# EAGLE board PCB_schematic_v1 (EAGLE 9.6.2), part 1 of 2
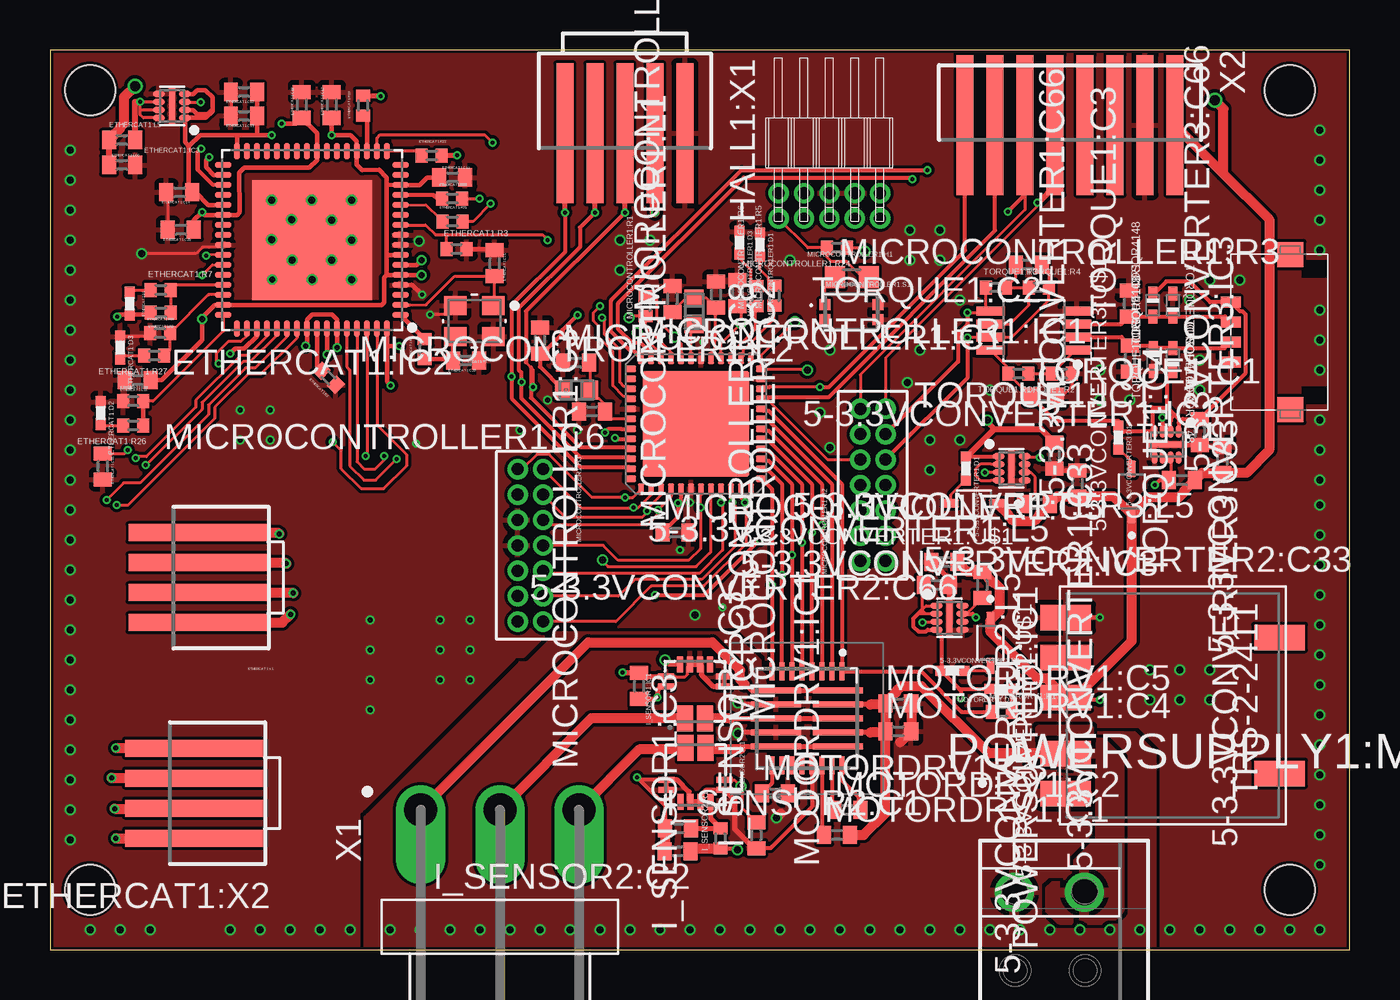
[diagram p0: board, top side]
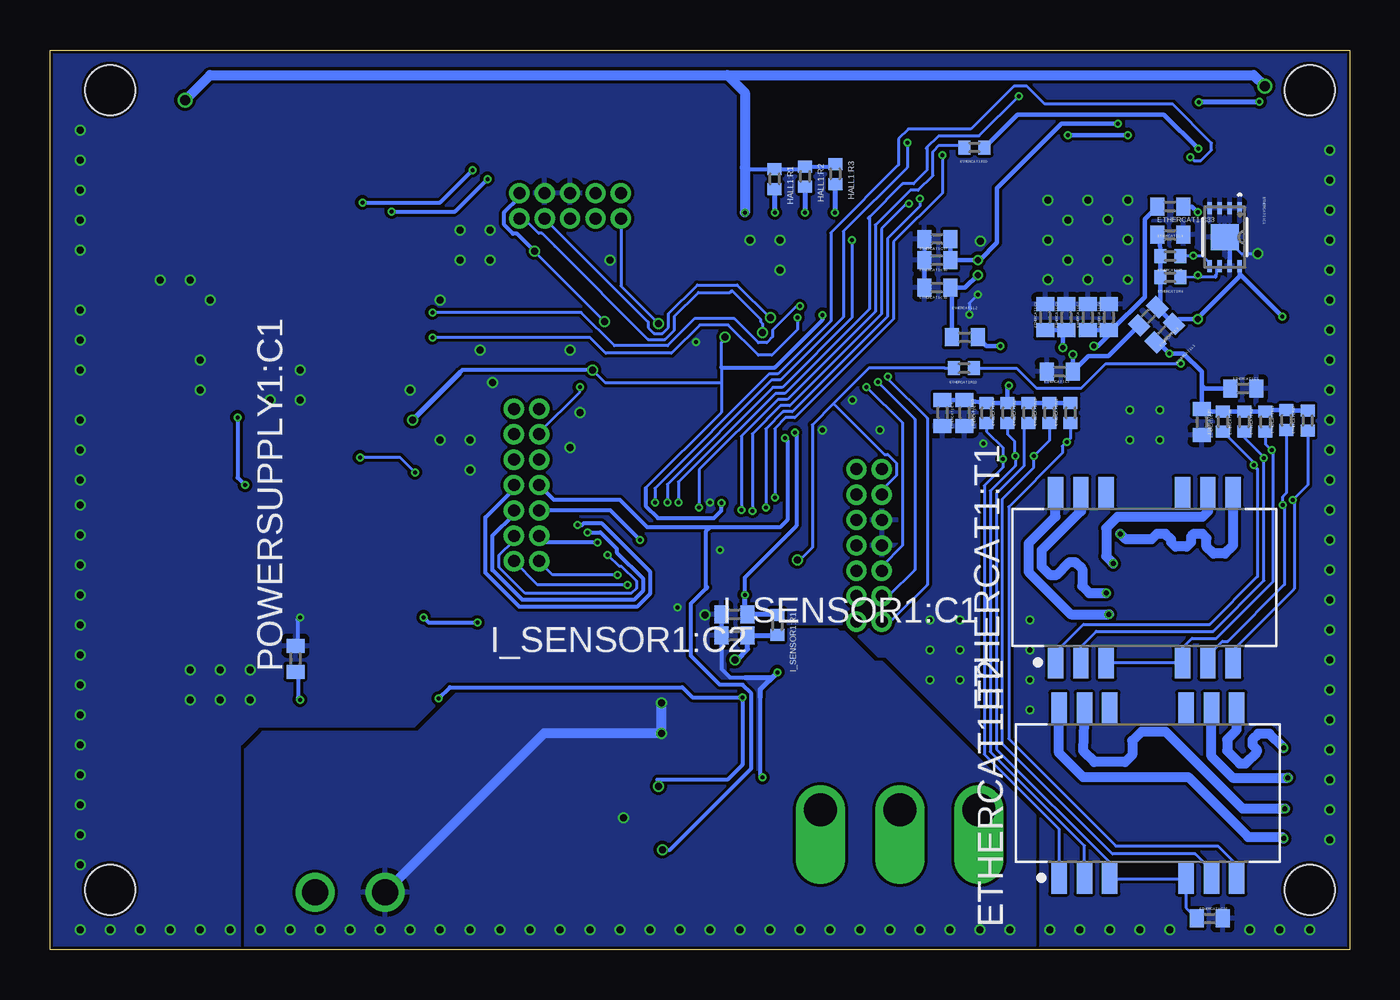
[diagram p1: board, bottom side, seen from below]

Size 65 x 45 mm. Coordinates in mm from the lower left corner, seen from the top.
Outline: 0,0 65,0 65,45 0,45 0,0
Copper layers (1*16): Top 0.035mm / dielectric 1.5mm / Bottom 0.035mm
Design rules "msrm": minimum track width 0.1mm, minimum drill 0.2mm, track to track 6mil, track to pad 6mil, pad to pad 6mil, via to via 6mil, smd to smd 6mil, copper to edge 6mil, drill to drill 6mil, minimum pad ring 0.1mm, minimum via ring 0.1mm, stop-mask expansion 4mil, vias tented up to drill 0mil, thermal gap 10mil
Net classes: 0 Signal: width 0.152 mm, drill 0.2 mm, clearance 0.152 mm; 1 Power: width 0.5 mm, drill 0.2 mm, clearance 0.152 mm; 2 Ethernet: width 0.152 mm, drill 0.25 mm, clearance 0.1 mm
Holes 2.5 mm at 2,43 62,43 2,3 62,3

## Footprints (pad centres in the part's own frame; a part is rotated, then mirrored left to right if it is on the bottom)
C0402 = smd 0.7 x 0.9: 1 -0.65,0; 2 0.65,0
LED0402 = smd 0.6 x 0.5: 1 -0.55,0; 2 0.55,0
SON40P120X160X40-9T30X130N = smd 0.611 x 0.3: 1 -0.651,0.6; 2 -0.651,0.2; 3 -0.651,-0.2; 4 -0.651,-0.6; 5 0.651,-0.6; 6 0.651,-0.2; 7 0.651,0.2; 8 0.651,0.6 | smd 0.3 x 1.8: 9 0,0
BEAD0402 = smd 0.7 x 0.9: 1 -0.65,0; 2 0.65,0
SODFL2513X100N = smd 0.82 x 0.44: A 1.15,0; C -1.15,0
UDFN8 = smd 0.606 x 0.225: 1 -1.446,0.75; 2 -1.446,0.25; 3 -1.446,-0.25; 4 -1.446,-0.75; 5 1.446,-0.75; 6 1.446,-0.25; 7 1.446,0.25; 8 1.446,0.75 | smd 1.295 x 1.397: 9 0,0
QFN64-T600 = smd 0.837 x 0.264: 1 -4.437,3.75; 2 -4.437,3.25; 3 -4.437,2.75; 4 -4.437,2.25; 5 -4.437,1.75; 6 -4.437,1.25; 7 -4.437,0.75; 8 -4.437,0.25; 9 -4.437,-0.25; 10 -4.437,-0.75; 11 -4.437,-1.25; 12 -4.437,-1.75; 13 -4.437,-2.25; 14 -4.437,-2.75; 15 -4.437,-3.25; 16 -4.437,-3.75; 33 4.437,-3.75; 34 4.437,-3.25; 35 4.437,-2.75; 36 4.437,-2.25; 37 4.437,-1.75; 38 4.437,-1.25; 39 4.437,-0.75; 40 4.437,-0.25; 41 4.437,0.25; 42 4.437,0.75; 43 4.437,1.25; 44 4.437,1.75; 45 4.437,2.25; 46 4.437,2.75; 47 4.437,3.25; 48 4.437,3.75 | smd 0.264 x 0.837: 17 -3.75,-4.437; 18 -3.25,-4.437; 19 -2.75,-4.437; 20 -2.25,-4.437; 21 -1.75,-4.437; 22 -1.25,-4.437; 23 -0.75,-4.437; 24 -0.25,-4.437; 25 0.25,-4.437; 26 0.75,-4.437; 27 1.25,-4.437; 28 1.75,-4.437; 29 2.25,-4.437; 30 2.75,-4.437; 31 3.25,-4.437; 32 3.75,-4.437; 49 3.75,4.437; 50 3.25,4.437; 51 2.75,4.437; 52 2.25,4.437; 53 1.75,4.437; 54 1.25,4.437; 55 0.75,4.437; 56 0.25,4.437; 57 -0.25,4.437; 58 -0.75,4.437; 59 -1.25,4.437; 60 -1.75,4.437; 61 -2.25,4.437; 62 -2.75,4.437; 63 -3.25,4.437; 64 -3.75,4.437 | smd 6 x 6: 65 0,0
R0402 = smd 0.6 x 0.7: 1 -0.5,0; 2 0.5,0
SOIC127P965X533-16-TRAFO = smd 1.512 x 0.772: 1 -4.275,4.445; 2 -4.275,3.175; 3 -4.275,1.905; 6 -4.275,-1.905; 7 -4.275,-3.175; 8 -4.275,-4.445; 9 4.275,-4.445; 10 4.275,-3.175; 11 4.275,-1.905; 14 4.275,1.905; 15 4.275,3.175; 16 4.275,4.445
87438-04 = smd 7 x 0.85: 1 0,2.25; 2 0,0.75; 3 0,-0.75; 4 0,-2.25
ECX-2236 = smd 1.112 x 0.962: 1 -0.95,-0.775; 2 0.95,-0.775; 3 0.95,0.775; 4 -0.95,0.775
87438-05 = smd 7 x 0.85: 1 0,3; 2 0,1.5; 3 0,0; 4 0,-1.5; 5 0,-3
QFN12-ES = smd 1.3 x 0.8: 1,2 -1.35,0.5; 3,4 -1.35,-0.5 | smd 0.3 x 0.8: 5 0.25,-1.45; 6 0.75,-1.45; 11 0.75,1.45; 12 0.25,1.45 | smd 0.8 x 0.3: 7 1.35,-0.75; 8 1.35,-0.25; 9 1.35,0.25; 10 1.35,0.75
20021112-00010 = drill 0.6 pad 1.016: 1 -2.54,-0.635; 2 -2.54,0.635; 3 -1.27,-0.635; 4 -1.27,0.635; 5 0,-0.635; 6 0,0.635; 7 1.27,-0.635; 8 1.27,0.635; 9 2.54,-0.635; 10 2.54,0.635
20021111-00014 = drill 0.6 pad 1.016: 1 -3.81,-0.635; 2 -3.81,0.635; 3 -2.54,-0.635; 4 -2.54,0.635; 5 -1.27,-0.635; 6 -1.27,0.635; 7 0,-0.635; 8 0,0.635; 9 1.27,-0.635; 10 1.27,0.635; 11 2.54,-0.635; 12 2.54,0.635; 13 3.81,-0.635; 14 3.81,0.635
QFN48 = smd 0.55 x 0.3: 1 -3.275,2.75; 2 -3.275,2.25; 3 -3.275,1.75; 4 -3.275,1.25; 5 -3.275,0.75; 6 -3.275,0.25; 7 -3.275,-0.25; 8 -3.275,-0.75; 9 -3.275,-1.25; 10 -3.275,-1.75; 11 -3.275,-2.25; 12 -3.275,-2.75; 25 3.275,-2.75; 26 3.275,-2.25; 27 3.275,-1.75; 28 3.275,-1.25; 29 3.275,-0.75; 30 3.275,-0.25; 31 3.275,0.25; 32 3.275,0.75; 33 3.275,1.25; 34 3.275,1.75; 35 3.275,2.25; 36 3.275,2.75 | smd 0.3 x 0.55: 13 -2.75,-3.275; 14 -2.25,-3.275; 15 -1.75,-3.275; 16 -1.25,-3.275; 17 -0.75,-3.275; 18 -0.25,-3.275; 19 0.25,-3.275; 20 0.75,-3.275; 21 1.25,-3.275; 22 1.75,-3.275; 23 2.25,-3.275; 24 2.75,-3.275; 37 2.75,3.275; 38 2.25,3.275; 39 1.75,3.275; 40 1.25,3.275; 41 0.75,3.275; 42 0.25,3.275; 43 -0.25,3.275; 44 -0.75,3.275; 45 -1.25,3.275; 46 -1.75,3.275; 47 -2.25,3.275; 48 -2.75,3.275 | smd 5.309 x 5.309: EXP 0,0
BEADC1608X80 = smd 0.813 x 0.94: 1 -0.673,0; 2 0.673,0
R0603 = smd 1 x 1.1: 1 -0.85,0; 2 0.85,0
USLPT2616CT = smd 0.55 x 0.55: 1 -1.325,0.375; 2 1.325,0.375; 3 -1.325,-0.375; 4 1.325,-0.375
MP6540HGUP = smd 0.9 x 0.25: 1 -2.35,1.75; 2 -2.35,1.25; 3 -2.35,0.75; 4 -2.35,0.25; 5 -2.35,-0.25; 6 -2.35,-0.75; 7 -2.35,-1.25; 8 -2.35,-1.75; 14 2.35,-1.75; 15 2.35,-1.25; 16 2.35,-0.75; 17 2.35,-0.25; 18 2.35,0.25; 19 2.35,0.75; 20 2.35,1.25; 21 2.35,1.75 | smd 0.3 x 2.5: 9 -1.4,-1.55; 10 -0.7,-1.55; 11 0,-1.55; 12 0.7,-1.55; 13 1.4,-1.55; 22 1.4,1.55; 23 0.7,1.55; 24 0,1.55; 25 -0.7,1.55; 26 -1.4,1.55
7-SMD = smd 1.27 x 2.54: 1 4.4,-5.35; 2 2.4,-5.35; 3 -0.4,-5.35; 4 -2.4,-5.35; 5 -4.4,-5.35; 6 3.4,5.35; 7 -3.4,5.35
1945096 = drill 1.3: 1 -1.75,0; 2 1.75,0
0402/SOD-923F = smd 0.711 x 0.457: 1 -0.572,0; 2 0.572,0
USOP8 = smd 1.425 x 0.467: 1 -2.164,0.975; 2 -2.164,0.325; 3 -2.164,-0.325; 4 -2.164,-0.975; 5 2.164,-0.975; 6 2.164,-0.325; 7 2.164,0.325; 8 2.164,0.975
5037630491 = smd 0.55 x 1: 1 1.5,0; 2 0.5,0; 3 -0.5,0; 4 -1.5,0 | smd 1.26 x 1.3: P$1 3.875,2.99; P$2 -3.875,2.99
B3PS-VH(LF)(SN) = drill 1.65 offset: 1 -3.96,0; 2 0,0; 3 3.96,0
87438-08 = smd 7 x 0.85: 1 0,5.25; 2 0,3.75; 3 0,2.25; 4 0,0.75; 5 0,-0.75; 6 0,-2.25; 7 0,-3.75; 8 0,-5.25

## Placement (x,y rotation side)
5-3.3VCONVERTER1:C33  GRM155C80J106ME11D  [C0402]  50.25,24.71 270 top
5-3.3VCONVERTER1:C66  GCM155C71A105KE38D  [C0402]  51.39,23.31 90 top
5-3.3VCONVERTER1:D1  QBLP595-R  [LED0402]  45.82,24.06 270 top
5-3.3VCONVERTER1:IC3  RP115L331D-E2  [SON40P120X160X40-9T30X130N]  48.09,24.07 0 top
5-3.3VCONVERTER1:L5  BLM15EG221SH1D  [BEAD0402]  49.36,22.3 180 top
5-3.3VCONVERTER1:U$1  MM3Z3V0B  [SODFL2513X100N]  46.22,22.32 180 top
5-3.3VCONVERTER2:C33  GRM155C80J106ME11D  [C0402]  44.35,18.24 0 top
5-3.3VCONVERTER2:C66  GCM155C71A105KE38D  [C0402]  44.75,19.38 180 top
5-3.3VCONVERTER2:D1  QBLP595-R  [LED0402]  45.13,13.93 0 top
5-3.3VCONVERTER2:IC3  RP115L331D-E2  [SON40P120X160X40-9T30X130N]  44.98,16.59 0 top
5-3.3VCONVERTER2:L5  BLM15EG221SH1D  [BEAD0402]  46.64,18.24 270 top
5-3.3VCONVERTER2:U$1  MM3Z3V0B  [SODFL2513X100N]  47.05,15.34 270 top
5-3.3VCONVERTER3:C33  GRM155C80J106ME11D  [C0402]  57.5,25.89 270 top
5-3.3VCONVERTER3:C66  GCM155C71A105KE38D  [C0402]  58.64,24.5 90 top
5-3.3VCONVERTER3:D1  QBLP595-R  [LED0402]  53.45,25.62 270 top
5-3.3VCONVERTER3:IC3  RP115L331D-E2  [SON40P120X160X40-9T30X130N]  55.85,25.26 270 top
5-3.3VCONVERTER3:L5  BLM15EG221SH1D  [BEAD0402]  56.61,23.48 180 top
5-3.3VCONVERTER3:U$1  MM3Z3V0B  [SODFL2513X100N]  54.1,22.9 90 top
ETHERCAT1:C1  GCM155C71A105KE38D  [C0402]  5.32,28.06 0 bottom
ETHERCAT1:C2  100n  [C0402]  7.4,26.39 270 bottom
ETHERCAT1:C3  GCM155C71A105KE38D  [C0402]  19.26,26.85 270 bottom
ETHERCAT1:C4  100n  [C0402]  20.36,26.85 270 bottom
ETHERCAT1:C5  100n  [C0402]  14.5,28.9 180 bottom
ETHERCAT1:C6  1u  [C0402]  12.04,31.63 90 bottom
ETHERCAT1:C7  100n  [C0402]  13.1,31.63 90 bottom
ETHERCAT1:C8  1u  [C0402]  15.22,31.63 90 bottom
ETHERCAT1:C9  100n  [C0402]  14.16,31.63 90 bottom
ETHERCAT1:C10  100n  [C0402]  20.62,33.11 180 bottom
ETHERCAT1:C11  100n  [C0402]  20.12,38.62 0 top
ETHERCAT1:C12  100n  [C0402]  14.1,42.25 90 top
ETHERCAT1:C13  100n  [C0402]  9.7,41.7 180 top
ETHERCAT1:C14  100n  [C0402]  6.47,37.88 180 top
ETHERCAT1:C15  100n  [C0402]  4.38,28.49 180 top
ETHERCAT1:C16  1u  [C0402]  20.62,34.49 180 bottom
ETHERCAT1:C17  470p  [C0402]  20.62,35.55 180 bottom
ETHERCAT1:C18  100n  [C0402]  12.6,42.25 90 top
ETHERCAT1:C19  100n  [C0402]  6.55,36.01 180 top
ETHERCAT1:C20  18p  [C0402]  20.8,29.46 180 top
ETHERCAT1:C21  18p  [C0402]  22.25,34.33 270 top
ETHERCAT1:C22  100n  [C0402]  9.7,42.9 180 top
ETHERCAT1:C31  22n  [C0402]  2.64,24.17 270 top
ETHERCAT1:C32  22n  [C0402]  6.99,1.55 0 bottom
ETHERCAT1:C33  GRM155C80J106ME11D  [C0402]  8.97,35.75 0 bottom
ETHERCAT1:C66  GCM155C71A105KE38D  [C0402]  3.6,39.25 0 top
ETHERCAT1:D1  QBLP595-IG  [LED0402]  3.98,32.3 270 top
ETHERCAT1:D2  QBLP595-IB  [LED0402]  2.54,26.84 270 top
ETHERCAT1:D3  QBLP595-O  [LED0402]  3.51,30.11 270 top
ETHERCAT1:IC1  CAT24C512IGT3HU5  [UDFN8]  6.24,35.63 270 bottom
ETHERCAT1:IC2  LAN9253-I/R4X  [QFN64-T600]  13.1,35.5 180 top
ETHERCAT1:IC3  RP115L331D-E2  [SON40P120X160X40-9T30X130N]  6.1,42.2 180 top
ETHERCAT1:L1  BLM15EG221SH1D  [BEAD0402]  9.24,30.83 225 bottom
ETHERCAT1:L2  BLM15EG221SH1D  [BEAD0402]  19.25,30.63 0 bottom
ETHERCAT1:L3  BLM15EG221SH1D  [BEAD0402]  10.07,31.68 225 bottom
ETHERCAT1:L4  BLM15EG221SH1D  [BEAD0402]  8.97,37.16 180 bottom
ETHERCAT1:L5  BLM15EG221SH1D  [BEAD0402]  3.6,40.5 0 top
ETHERCAT1:R1  RT0402FRE070RL  [R0402]  18.75,30.03 90 top
ETHERCAT1:R2  12k1  [R0402]  13.94,28.6 135 top
ETHERCAT1:R3  RL1206FR-7WL  [R0402]  20.34,35.05 0 top
ETHERCAT1:R4  4k7  [R0402]  8.97,33.63 180 bottom
ETHERCAT1:R5  4k7  [R0402]  8.97,34.69 180 bottom
ETHERCAT1:R6  10k  [R0402]  5.55,31.87 180 top
ETHERCAT1:R7  RL1206FR-7WL  [R0402]  5.55,33 0 top
ETHERCAT1:R8  49R9  [R0402]  5.27,26.41 90 bottom
ETHERCAT1:R9  49R9  [R0402]  6.33,26.41 90 bottom
ETHERCAT1:R10  49R9  [R0402]  2.1,26.46 90 bottom
ETHERCAT1:R11  49R9  [R0402]  3.15,26.48 90 bottom
ETHERCAT1:R12  49R9  [R0402]  13.96,26.85 90 bottom
ETHERCAT1:R13  49R9  [R0402]  15.01,26.85 90 bottom
ETHERCAT1:R14  49R9  [R0402]  17.11,26.85 90 bottom
ETHERCAT1:R15  49R9  [R0402]  18.16,26.85 90 bottom
ETHERCAT1:R16  RT0402FRE070RL  [R0402]  4.21,26.41 90 bottom
ETHERCAT1:R17  RT0402FRE070RL  [R0402]  16.06,26.85 90 bottom
ETHERCAT1:R18  100  [R0402]  15.66,42.22 90 top
ETHERCAT1:R19  100  [R0402]  19.28,29.08 180 bottom
ETHERCAT1:R20  100  [R0402]  18.76,40.12 180 bottom
ETHERCAT1:R21  100  [R0402]  20.13,36.42 0 top
ETHERCAT1:R22  100  [R0402]  20.12,37.56 0 top
ETHERCAT1:R23  100  [R0402]  19.1,39.72 0 top
ETHERCAT1:R24  10k  [R0402]  4.16,27.43 0 top
ETHERCAT1:R25  10k  [R0402]  5.5,30.84 0 top
ETHERCAT1:R26  RL1206FR-7WL  [R0402]  4.16,26.21 180 top
ETHERCAT1:R27  RL1206FR-7WL  [R0402]  5.22,29.71 180 top
ETHERCAT1:T1  749020100  [SOIC127P965X533-16-TRAFO]  10.26,18.61 90 bottom
ETHERCAT1:T2  749020100  [SOIC127P965X533-16-TRAFO]  10.08,7.82 90 bottom
ETHERCAT1:X1  87438-0443  [87438-04]  7.43,18.61 180 top
ETHERCAT1:X2  87438-0443  [87438-04]  7.26,7.82 180 top
ETHERCAT1:Y1  [ECX-2236]  21.23,31.44 180 top
HALL1:R1  RT0402BRD0710KL  [R0402]  28.76,38.55 270 bottom
HALL1:R2  RT0402BRD0710KL  [R0402]  27.24,38.67 270 bottom
HALL1:R3  RT0402BRD0710KL  [R0402]  25.71,38.8 270 bottom
HALL1:X1  87438-0543  [87438-05]  28.76,40.83 270 top
I_SENSOR1:C1  GCM155R71E103KA37  [C0402]  30.76,15.7 0 bottom
I_SENSOR1:C2  GCM155R71C104JA55  [C0402]  30.77,16.77 180 bottom
I_SENSOR1:C3  GCM155R71C104JA55  [C0402]  29.47,13.18 270 top
I_SENSOR1:IC1  ACS70331EESATR-005B3  [QFN12-ES]  32.26,12.91 90 top
I_SENSOR1:R1  RT0402FRE07100RL  [R0402]  28.62,16.23 270 bottom
I_SENSOR2:C1  GCM155R71E103KA37  [C0402]  31.42,6.07 0 top
I_SENSOR2:C2  GCM155R71C104JA55  [C0402]  31.39,4.92 180 top
I_SENSOR2:C3  GCM155R71C104JA55  [C0402]  35.33,5.71 90 top
I_SENSOR2:IC1  ACS70331EESATR-005B3  [QFN12-ES]  32.29,8.73 270 top
I_SENSOR2:R1  RT0402FRE07100RL  [R0402]  33.53,5.56 90 top
MICROCONTROLLER1:C1  GRM155C80J106ME11D  [C0402]  26.31,29.35 0 top
MICROCONTROLLER1:C2  GCM155R71C104JA55  [C0402]  34.38,32.84 270 top
MICROCONTROLLER1:C3  GRM155C80J106ME11D  [C0402]  24.5,30.46 270 top
MICROCONTROLLER1:C5  GCM155R71C104JA55  [C0402]  31.28,20.85 0 top
MICROCONTROLLER1:C6  GCM155R71C104JA55  [C0402]  27.12,26.91 180 top
MICROCONTROLLER1:C7  GCM155R71C104JA55  [C0402]  31.13,32.54 90 top
MICROCONTROLLER1:C8  GRM155C80J475MEAAD  [C0402]  33.32,32.76 270 top
MICROCONTROLLER1:D1  QBLP595-AG  [LED0402]  35.52,35.25 270 top
MICROCONTROLLER1:D3  QBLP595-AG  [LED0402]  34.49,35.36 270 top
MICROCONTROLLER1:H1  20021112-00010T4LF  [20021112-00010]  38.98,37.2 180 top
MICROCONTROLLER1:H2  20021111-00014T1LF  [20021111-00014]  41.16,23.24 90 top
MICROCONTROLLER1:H3  20021111-00014T1LF  [20021111-00014]  24.03,20.22 270 top
MICROCONTROLLER1:IC1  ATSAMD51G19A-MUT  [QFN48]  32.31,26.3 0 top
MICROCONTROLLER1:L1  BLM18EG601SN1D  [BEADC1608X80]  32.22,31.93 90 top
MICROCONTROLLER1:L2  BLM18EG601SN1D  [BEADC1608X80]  26.34,27.99 0 top
MICROCONTROLLER1:R1  RT0402FRE071KL  [R0402]  29.79,32.19 90 top
MICROCONTROLLER1:R3  RT0603FRE07330RL  [R0603]  40.1,33.64 0 top
MICROCONTROLLER1:R5  10k  [R0402]  36.23,32.7 90 top
MICROCONTROLLER1:R6  10k  [R0402]  35.35,32.7 90 top
MICROCONTROLLER1:R24  10k  [R0402]  39.37,35.1 180 top
MICROCONTROLLER1:S1  USLPT2616CT2TR  [USLPT2616CT]  40.08,31.88 0 top
MOTORDRV1:C1  GRM155R6YA105KE11D  [C0402]  39.36,5.73 0 top
MOTORDRV1:C2  GRM155R62A104KE14  [C0402]  39.88,6.98 0 top
MOTORDRV1:C3  GRM155R61H472KA01D  [C0402]  36.27,7.83 0 top
MOTORDRV1:C4  GRM155R62A104KE14  [C0402]  42.42,10.92 0 top
MOTORDRV1:C5  GRM155R62A104KE14  [C0402]  42.42,12.31 0 top
MOTORDRV1:D1  QBLP595-R  [LED0402]  47.59,13.03 180 top
MOTORDRV1:IC1  [MP6540HGUP]  37.85,11.55 270 top
MOTORDRV1:R1  RT0402BRD0710KL  [R0402]  47.62,11.89 0 top
POWERSUPPLY1:C1  GRM155R6YA105KE11D  [C0402]  52.72,14.54 90 bottom
POWERSUPPLY1:IC1  TRS-2-2411  [7-SMD]  56.15,12.21 270 top
POWERSUPPLY1:M1  PST1,3/2-3,5  [1945096]  49.98,2.86 0 top
POWERSUPPLY1:U$1  PTDA1,5/2-PH-3,5  [1725107]  50.02,2.95 0 top
TORQUE1:C1  GCM155R71C104JA55  [C0402]  49.72,27.66 0 top
TORQUE1:C2  GCM155R71E103KA37  [C0402]  48.96,34.27 180 top
TORQUE1:C3  GCM155R71E103KA37  [C0402]  53.96,32.32 90 top
TORQUE1:C4  GCM155R71E103KA37  [C0402]  54.02,29.56 270 top
TORQUE1:CR1  CDSQR4148  [0402/SOD-923F]  55.16,32.24 90 top
TORQUE1:CR2  CDSQR4148  [0402/SOD-923F]  56.17,32.24 270 top
TORQUE1:CR3  CDSQR4148  [0402/SOD-923F]  55.18,29.51 90 top
TORQUE1:CR4  CDSQR4148  [0402/SOD-923F]  56.17,29.51 270 top
TORQUE1:IC1  MAX4208AUA+T  [USOP8]  49.21,30.96 180 top
TORQUE1:R1  RT0402FRE0710KL  [R0402]  48.45,28.81 180 top
TORQUE1:R2  RT0402FRE0710KL  [R0402]  50.61,28.81 180 top
TORQUE1:R3  RT0402FRE07150RL  [R0402]  47.3,33.12 0 top
TORQUE1:R4  RT0402FRE07100KL  [R0402]  49.46,33.12 0 top
TORQUE1:X3  5037630491  [5037630491]  59.05,30.89 270 top
X1  B3PS-VH(LF)(SN)  [B3PS-VH(LF)(SN)]  22.5,7 0 top
X2  87438-0843  [87438-08]  51.02,41.25 270 top

## Library data of the parts
5-3.3VCONVERTER1:C33 5-3.3VCONVERTER2:C33 5-3.3VCONVERTER3:C33 ETHERCAT1:C33 MICROCONTROLLER1:C1 MICROCONTROLLER1:C3 = msrm; CAPACITANCE: 10uF; DIGIKEY: 490-13233-1-ND; TOLERANCE: ±20%; VOLTAGE: 6.3V
5-3.3VCONVERTER1:C66 5-3.3VCONVERTER2:C66 5-3.3VCONVERTER3:C66 ETHERCAT1:C1 ETHERCAT1:C3 ETHERCAT1:C6 ETHERCAT1:C8 ETHERCAT1:C16 ETHERCAT1:C66 = msrm; CAPACITANCE: 1uF; DIGIKEY: 490-13409-1-ND; TOLERANCE: ±10%; VOLTAGE: 10V
5-3.3VCONVERTER1:D1 5-3.3VCONVERTER2:D1 5-3.3VCONVERTER3:D1 MOTORDRV1:D1 = msrm; COLOR: Red; DIGIKEY: 1516-1217-1-ND
5-3.3VCONVERTER1:IC3 5-3.3VCONVERTER2:IC3 5-3.3VCONVERTER3:IC3 ETHERCAT1:IC3 = msrm; CURRENT: 1A; DIGIKEY: 2129-RP115L331D-E2CT-ND; INPUT: 5.25V; OUTPUT: 3.3V
5-3.3VCONVERTER1:L5 5-3.3VCONVERTER2:L5 5-3.3VCONVERTER3:L5 ETHERCAT1:L1-ETHERCAT1:L5 = msrm; DC_RES: 280mOhm; DIGIKEY: 490-17345-1-ND; IMPEDANCE-FREQUENCY: 220 Ohms @ 100MHz
5-3.3VCONVERTER1:U$1 5-3.3VCONVERTER2:U$1 5-3.3VCONVERTER3:U$1 = msrm; ZENER_VOLTAGE: 3.0V
ETHERCAT1:C2 ETHERCAT1:C4 ETHERCAT1:C5 ETHERCAT1:C7 ETHERCAT1:C9-ETHERCAT1:C15 ETHERCAT1:C18 ETHERCAT1:C19 ETHERCAT1:C22 I_SENSOR1:C2 I_SENSOR1:C3 I_SENSOR2:C2 I_SENSOR2:C3 MICROCONTROLLER1:C2 MICROCONTROLLER1:C5-MICROCONTROLLER1:C7 TORQUE1:C1 = msrm; CAPACITANCE: 100nF; DIGIKEY: 490-16433-1-ND; TOLERANCE: ±5%; VOLTAGE: 16V
ETHERCAT1:C17 = msrm; CAPACITANCE: 470pF; DIGIKEY: 490-4913-1-ND; TOLERANCE: ±10%; VOLTAGE: 50V
ETHERCAT1:C20 ETHERCAT1:C21 = msrm; CAPACITANCE: 18pF; DIGIKEY: 490-12650-1-ND; TOLERANCE: ±5%; VOLTAGE: 50V
ETHERCAT1:C31 ETHERCAT1:C32 = msrm; CAPACITANCE: 22nF; DIGIKEY: 490-6044-1-ND; TOLERANCE: ±10%; VOLTAGE: 25V
ETHERCAT1:D1 = msrm; COLOR: Green; DIGIKEY: 1516-1216-1-ND
ETHERCAT1:D2 = msrm; COLOR: Blue; DIGIKEY: 1516-1215-1-ND
ETHERCAT1:D3 = msrm; COLOR: Orange; DIGIKEY: 1516-1220-1-ND
ETHERCAT1:IC1 = msrm; DIGIKEY: CAT24C512HU5IGT3OSCT-ND; LEAD_FINISH: NiPdAu; TEMPERATURE: -40°C ~ 85°C
ETHERCAT1:IC2 = msrm; DIGIKEY: 150-LAN9253-I/R4X-ND; TAPE_AND_REEL: Tray; TEMP: -40°C to 85°C
ETHERCAT1:R1 ETHERCAT1:R16 ETHERCAT1:R17 = msrm; DIGIKEY: 311-0.0LRCT-ND; NOTES: Actual Part Number: RC0402FR-070RL; RVALUE: 0R; SPICEPREFIX: R
ETHERCAT1:R2 = msrm; DIGIKEY: RT0402FRE0712K1L-ND; RVALUE: 12k1; SPICEPREFIX: R
ETHERCAT1:R3 ETHERCAT1:R6 ETHERCAT1:R7 ETHERCAT1:R24-ETHERCAT1:R27 MICROCONTROLLER1:R5 MICROCONTROLLER1:R6 MICROCONTROLLER1:R24 TORQUE1:R1 TORQUE1:R2 = msrm; DIGIKEY: YAG1233CT-ND; RVALUE: 10k; SPICEPREFIX: R
ETHERCAT1:R4 ETHERCAT1:R5 = msrm; DIGIKEY: YAG3347CT-ND; RVALUE: 4k7; SPICEPREFIX: R
ETHERCAT1:R8-ETHERCAT1:R15 = msrm; DIGIKEY: YAG3346CT-ND; RVALUE: 49R9; SPICEPREFIX: R
ETHERCAT1:R18-ETHERCAT1:R23 I_SENSOR1:R1 I_SENSOR2:R1 = msrm; DIGIKEY: YAG3342CT-ND; RVALUE: 100; SPICEPREFIX: R
ETHERCAT1:T1 ETHERCAT1:T2 = msrm; DIGIKEY: 732-3268-1-ND
ETHERCAT1:X1 ETHERCAT1:X2 = msrm; DIGIKEY: WM7648CT-ND; MF: MOLEX
ETHERCAT1:Y1 = msrm; DIGIKEY: XC3051CT-ND; F: 25MHz; F_TOLERANCE: ±10ppm; L_CAPACITANCE: 18pF
HALL1:R1-HALL1:R3 MOTORDRV1:R1 = msrm; DIGIKEY: ‎A119918CT-ND‎; RVALUE: 10k; SPICEPREFIX: R
HALL1:X1 = msrm; COLOR: beige; DIGIKEY: WM7649CT-ND
I_SENSOR1:C1 I_SENSOR2:C1 TORQUE1:C2-TORQUE1:C4 = msrm; CAPACITANCE: 10nF; DIGIKEY: 490-6043-1-ND; TOLERANCE: ±10%; VOLTAGE: 25V
I_SENSOR1:IC1 I_SENSOR2:IC1 = msrm; CURRENT_RANGE: -5~5A; DIGIKEY: 620-1887-1-ND; SENSITIVITY: 200mV/A
MICROCONTROLLER1:C8 = msrm; CAPACITANCE: 4.7uF; DIGIKEY: 490-14458-1-ND; TOLERANCE: ±20%; VOLTAGE: 6.3V
MICROCONTROLLER1:D1 MICROCONTROLLER1:D3 = msrm; COLOR: Yellow-Green; DIGIKEY: 1516-1218-1-ND
MICROCONTROLLER1:H1 = msrm; DIGIKEY: 609-5926-ND; PINS: 10
MICROCONTROLLER1:H2 MICROCONTROLLER1:H3 = msrm; DIGIKEY: 609-4810-ND
MICROCONTROLLER1:IC1 = msrm; DIGIKEY: ATSAMD51G19A-MU-ND; FLASH: 512KB; SRAM: 192KB
MICROCONTROLLER1:L1 MICROCONTROLLER1:L2 = msrm; DC_RES: 350mOhm; DIGIKEY: 490-3994-1-ND; IMPEDANCE-FREQUENCY: 600 Ohms @ 100MHz
MICROCONTROLLER1:R1 = msrm; DIGIKEY: YAG1234CT-ND; RVALUE: 1k; SPICEPREFIX: R
MICROCONTROLLER1:R3 = msrm; DIGIKEY: YAG5957CT-ND; RVALUE: 330; SPICEPREFIX: R
MICROCONTROLLER1:S1 = msrm; DIGIKEY: 450-3357-1-ND; FORCE: 160gf; HEIGHT: 0.55mm; MANUFACTURER_NAME: TE Connectivity; MANUFACTURER_PART_NUMBER: USLPT2616CT2TR; MOUSER_PART_NUMBER: 506-USLPT2616CT2TR
MOTORDRV1:C1 POWERSUPPLY1:C1 = msrm; CAPACITANCE: 1uF; DIGIKEY: 490-10019-1-ND; TOLERANCE: ±10%; VOLTAGE: 35V
MOTORDRV1:C2 MOTORDRV1:C4 MOTORDRV1:C5 = msrm; CAPACITANCE: 100nF; DIGIKEY: 490-10458-1-ND; TOLERANCE: ±10%; VOLTAGE: 100V
MOTORDRV1:C3 = msrm; CAPACITANCE: 4700PF; DIGIKEY: 490-6317-1-ND‎; TOLERANCE: ±10%; VOLTAGE: 50V
MOTORDRV1:IC1 = msrm; DIGIKEY: 1589-MP6540HGU-PCT-ND
POWERSUPPLY1:IC1 = msrm; CURRENT: 400mA; DIGIKEY: 1951-2058-ND; INPUT: 24V; MAX_CAPACITANCE: 1680uF; OUTPUT: 5V
POWERSUPPLY1:M1 = msrm; DIGIKEY: 277-1749-ND; PITCH: 3,5
POWERSUPPLY1:U$1 = msrm; DIGIKEY: 277-17182-ND
TORQUE1:CR1-TORQUE1:CR4 = msrm; CURRENT: 150mA; DIGIKEY: 641-1287-1-ND; VOLTAGE: 75V
TORQUE1:IC1 = msrm; DESCRIPTION: Instrument Amp Single R-R O/P 2.75/5.5V; DIGIKEY: MAX4208AUA+-ND; HEIGHT: 1.1mm; INPUT_RESISTANCE: 2G; MANUFACTURER_NAME: Maxim Integrated; MANUFACTURER_PART_NUMBER: MAX4208AUA+; MOUSER_PART_NUMBER: 700-MAX4208AUA; MOUSER_PRICE-STOCK: https://www.mouser.com/Search/Refine.aspx?Keyword=700-MAX4208AUA; RS_PART_NUMBER: 7328406P; RS_PRICE-STOCK: http://uk.rs-online.com/web/p/products/7328406P; SUPPLY_CURRENT: Buffer OFF: 0.75 - 1.3 mA Buffer ON: 1.4 - 2.3 mA; SUPPLY_VOLTAGE: Single: 2.85 - 5.5 Dual: ±1.425 - ±2.75; VOLTAGE_GAIN: 1 - (1 + R2/R1)
TORQUE1:R3 = msrm; DIGIKEY: 13-RT0402FRE07150RLCT-ND; RVALUE: 150; SPICEPREFIX: R
TORQUE1:R4 = msrm; DIGIKEY: YAG2307CT-ND; RVALUE: 100k; SPICEPREFIX: R
TORQUE1:X3 = msrm; DIGIKEY: WM10655CT-ND
X1 = msrm; DIGIKEY: 455-1649-ND
X2 = msrm; DIGIKEY: WM7652CT-ND

## Nets
5-3.3VCONVERTER1:N$1: 5-3.3VCONVERTER1:D1.2 5-3.3VCONVERTER1:U$1.A
5-3.3VCONVERTER1:VDD: 5-3.3VCONVERTER1:IC3.3 5-3.3VCONVERTER1:IC3.6 5-3.3VCONVERTER1:IC3.7 5-3.3VCONVERTER1:IC3.8 5-3.3VCONVERTER1:L5.2
5-3.3VCONVERTER2:N$1: 5-3.3VCONVERTER2:D1.2 5-3.3VCONVERTER2:U$1.A
5-3.3VCONVERTER2:VDD: 5-3.3VCONVERTER2:IC3.3 5-3.3VCONVERTER2:IC3.6 5-3.3VCONVERTER2:IC3.7 5-3.3VCONVERTER2:IC3.8 5-3.3VCONVERTER2:L5.2
5-3.3VCONVERTER3:N$1: 5-3.3VCONVERTER3:D1.2 5-3.3VCONVERTER3:U$1.A
5-3.3VCONVERTER3:VDD: 5-3.3VCONVERTER3:IC3.3 5-3.3VCONVERTER3:IC3.6 5-3.3VCONVERTER3:IC3.7 5-3.3VCONVERTER3:IC3.8 5-3.3VCONVERTER3:L5.2
+3V3_MD: 5-3.3VCONVERTER2:C33.1 5-3.3VCONVERTER2:D1.1 5-3.3VCONVERTER2:IC3.1 5-3.3VCONVERTER2:IC3.2 5-3.3VCONVERTER2:IC3.4 I_SENSOR1:C3.2 I_SENSOR1:IC1.12 I_SENSOR2:C3.2 I_SENSOR2:IC1.12 MOTORDRV1:D1.2
+3V3_TS: 5-3.3VCONVERTER3:C33.1 5-3.3VCONVERTER3:D1.1 5-3.3VCONVERTER3:IC3.1 5-3.3VCONVERTER3:IC3.2 5-3.3VCONVERTER3:IC3.4 TORQUE1:C1.1 TORQUE1:CR1.2 TORQUE1:CR4.2 TORQUE1:IC1.8 TORQUE1:R1.2 TORQUE1:X3.4
+3V3_UC: 5-3.3VCONVERTER1:C33.1 5-3.3VCONVERTER1:D1.1 5-3.3VCONVERTER1:IC3.1 5-3.3VCONVERTER1:IC3.2 5-3.3VCONVERTER1:IC3.4 MICROCONTROLLER1:C3.2 MICROCONTROLLER1:C5.1 MICROCONTROLLER1:H1.1 MICROCONTROLLER1:IC1.17 MICROCONTROLLER1:IC1.36 MICROCONTROLLER1:IC1.44 MICROCONTROLLER1:L2.1 MICROCONTROLLER1:R1.2 MICROCONTROLLER1:R24.1
+5V: 5-3.3VCONVERTER1:C66.1 5-3.3VCONVERTER1:L5.1 5-3.3VCONVERTER1:U$1.C 5-3.3VCONVERTER2:C66.1 5-3.3VCONVERTER2:L5.1 5-3.3VCONVERTER2:U$1.C 5-3.3VCONVERTER3:C66.1 5-3.3VCONVERTER3:L5.1 5-3.3VCONVERTER3:U$1.C ETHERCAT1:C66.1 ETHERCAT1:L5.1 HALL1:R1.1 HALL1:R2.1 HALL1:R3.1 HALL1:X1.2 POWERSUPPLY1:C1.1 POWERSUPPLY1:IC1.3 X2.1
+24V [Power]: MOTORDRV1:C1.2 MOTORDRV1:C4.1 MOTORDRV1:C5.1 MOTORDRV1:IC1.23 MOTORDRV1:IC1.25 POWERSUPPLY1:IC1.2 POWERSUPPLY1:M1.2
ADC_TS: MICROCONTROLLER1:H2.9 MICROCONTROLLER1:IC1.3 TORQUE1:C2.1 TORQUE1:IC1.7 TORQUE1:R4.2
AGND [Power]: MOTORDRV1:C3.2 MOTORDRV1:C4.2 MOTORDRV1:C5.2 MOTORDRV1:IC1.10 MOTORDRV1:IC1.12 POWERSUPPLY1:IC1.1 POWERSUPPLY1:M1.1
ENA: MICROCONTROLLER1:H2.7 MICROCONTROLLER1:IC1.30 MOTORDRV1:IC1.3
ENB: MICROCONTROLLER1:H2.5 MICROCONTROLLER1:IC1.29 MOTORDRV1:IC1.4
ENC: MICROCONTROLLER1:H2.4 MICROCONTROLLER1:IC1.28 MOTORDRV1:IC1.5
ENC_TEMP1: X2.3
ENC_TEMP2: X2.4
ENCODER_SPI_MISO: MICROCONTROLLER1:H2.10 MICROCONTROLLER1:IC1.33 X2.7
ENCODER_SPI_MOSI: MICROCONTROLLER1:H2.12 MICROCONTROLLER1:IC1.34 X2.8
ENCODER_SPI_NCS: MICROCONTROLLER1:H2.14 MICROCONTROLLER1:IC1.47 X2.6
ENCODER_SPI_SCK: MICROCONTROLLER1:H2.13 MICROCONTROLLER1:IC1.48 X2.5
ETH_CS: ETHERCAT1:R19.2 MICROCONTROLLER1:H3.3 MICROCONTROLLER1:IC1.20
ETH_IO2: ETHERCAT1:R21.2 MICROCONTROLLER1:H3.4 MICROCONTROLLER1:IC1.15
ETH_IO3: ETHERCAT1:R20.2 MICROCONTROLLER1:H3.6 MICROCONTROLLER1:IC1.16
ETH_MISO: ETHERCAT1:R22.2 MICROCONTROLLER1:H3.2 MICROCONTROLLER1:IC1.14
ETH_MOSI: ETHERCAT1:R23.2 MICROCONTROLLER1:H3.1 MICROCONTROLLER1:IC1.13
ETH_SCK: ETHERCAT1:R18.2 MICROCONTROLLER1:H3.8 MICROCONTROLLER1:IC1.19
ETHERCAT1:#MISO: ETHERCAT1:IC2.13 ETHERCAT1:R22.1
ETHERCAT1:#MOSI: ETHERCAT1:IC2.17 ETHERCAT1:R23.1
ETHERCAT1:#SCK: ETHERCAT1:IC2.19 ETHERCAT1:R18.1
ETHERCAT1:#SCS#: ETHERCAT1:IC2.50 ETHERCAT1:R19.1
ETHERCAT1:#SQI2: ETHERCAT1:IC2.12 ETHERCAT1:R21.1
ETHERCAT1:#SQI3: ETHERCAT1:IC2.35 ETHERCAT1:R20.1
ETHERCAT1:+3V3 [Power]: ETHERCAT1:C10.1 ETHERCAT1:C11.1 ETHERCAT1:C12.1 ETHERCAT1:C13.1 ETHERCAT1:C14.1 ETHERCAT1:C15.1 ETHERCAT1:C22.1 ETHERCAT1:C33.1 ETHERCAT1:D1.2 ETHERCAT1:IC1.8 ETHERCAT1:IC2.5 ETHERCAT1:IC2.7 ETHERCAT1:IC2.14 ETHERCAT1:IC2.20 ETHERCAT1:IC2.32 ETHERCAT1:IC2.37 ETHERCAT1:IC2.47 ETHERCAT1:IC3.1 ETHERCAT1:IC3.2 ETHERCAT1:IC3.4 ETHERCAT1:L1.1 ETHERCAT1:L2.1 ETHERCAT1:L3.1 ETHERCAT1:R4.2 ETHERCAT1:R5.2 ETHERCAT1:R6.2
ETHERCAT1:CT1: ETHERCAT1:C31.1 ETHERCAT1:R16.1 ETHERCAT1:T1.3 ETHERCAT1:T1.6
ETHERCAT1:CT2: ETHERCAT1:C32.1 ETHERCAT1:R17.1 ETHERCAT1:T2.3 ETHERCAT1:T2.6
ETHERCAT1:GPIO0: ETHERCAT1:IC2.48 ETHERCAT1:R24.2 ETHERCAT1:R26.1
ETHERCAT1:GPIO1: ETHERCAT1:IC2.46 ETHERCAT1:R25.2 ETHERCAT1:R27.1
ETHERCAT1:GPIO2: ETHERCAT1:IC2.45 ETHERCAT1:R6.1 ETHERCAT1:R7.2
ETHERCAT1:I2C_SCL: ETHERCAT1:IC1.6 ETHERCAT1:IC2.43 ETHERCAT1:R4.1
ETHERCAT1:I2C_SDA: ETHERCAT1:IC1.5 ETHERCAT1:IC2.42 ETHERCAT1:R5.1
ETHERCAT1:IN_RX_N [Ethernet]: ETHERCAT1:T1.9 ETHERCAT1:X1.4
ETHERCAT1:IN_RX_P [Ethernet]: ETHERCAT1:T1.10 ETHERCAT1:X1.3
ETHERCAT1:IN_TX_N [Ethernet]: ETHERCAT1:T1.15 ETHERCAT1:X1.2
ETHERCAT1:IN_TX_P [Ethernet]: ETHERCAT1:T1.16 ETHERCAT1:X1.1
ETHERCAT1:N$1: ETHERCAT1:D2.2 ETHERCAT1:R26.2
ETHERCAT1:N$2: ETHERCAT1:D3.2 ETHERCAT1:R27.2
ETHERCAT1:N$3: ETHERCAT1:IC3.3 ETHERCAT1:IC3.6 ETHERCAT1:IC3.7 ETHERCAT1:IC3.8 ETHERCAT1:L5.2
ETHERCAT1:N$15: ETHERCAT1:D1.1 ETHERCAT1:R7.1
ETHERCAT1:OSCI: ETHERCAT1:IC2.1 ETHERCAT1:R1.2
ETHERCAT1:OSCI1: ETHERCAT1:C20.2 ETHERCAT1:R1.1 ETHERCAT1:Y1.3
ETHERCAT1:OSCO: ETHERCAT1:C21.2 ETHERCAT1:IC2.2 ETHERCAT1:Y1.1
ETHERCAT1:OSCVDD12: ETHERCAT1:IC2.3
ETHERCAT1:OUT_RX_N [Ethernet]: ETHERCAT1:T2.9 ETHERCAT1:X2.4
ETHERCAT1:OUT_RX_P [Ethernet]: ETHERCAT1:T2.10 ETHERCAT1:X2.3
ETHERCAT1:OUT_TX_N [Ethernet]: ETHERCAT1:T2.15 ETHERCAT1:X2.2
ETHERCAT1:OUT_TX_P [Ethernet]: ETHERCAT1:T2.16 ETHERCAT1:X2.1
ETHERCAT1:RBIAS: ETHERCAT1:IC2.57 ETHERCAT1:R2.2
ETHERCAT1:RST#: ETHERCAT1:IC2.11
ETHERCAT1:RXA_N: ETHERCAT1:IC2.54 ETHERCAT1:R10.1 ETHERCAT1:T1.8
ETHERCAT1:RXA_P: ETHERCAT1:IC2.55 ETHERCAT1:R11.1 ETHERCAT1:T1.7
ETHERCAT1:RXB_N: ETHERCAT1:IC2.61 ETHERCAT1:R14.1 ETHERCAT1:T2.2
ETHERCAT1:RXB_P: ETHERCAT1:IC2.60 ETHERCAT1:R15.1 ETHERCAT1:T2.1
ETHERCAT1:TXA_N: ETHERCAT1:IC2.52 ETHERCAT1:R8.1 ETHERCAT1:T1.2
ETHERCAT1:TXA_P: ETHERCAT1:IC2.53 ETHERCAT1:R9.1 ETHERCAT1:T1.1
ETHERCAT1:TXB_N: ETHERCAT1:IC2.63 ETHERCAT1:R12.1 ETHERCAT1:T2.8
ETHERCAT1:TXB_P: ETHERCAT1:IC2.62 ETHERCAT1:R13.1 ETHERCAT1:T2.7
ETHERCAT1:VDD [Power]: ETHERCAT1:C16.1 ETHERCAT1:C17.1 ETHERCAT1:C18.1 ETHERCAT1:C19.1 ETHERCAT1:IC2.6 ETHERCAT1:IC2.24 ETHERCAT1:IC2.38 ETHERCAT1:L4.1
ETHERCAT1:VDD12TX [Power]: ETHERCAT1:C6.1 ETHERCAT1:C7.1 ETHERCAT1:C8.1 ETHERCAT1:C9.1 ETHERCAT1:IC2.56 ETHERCAT1:IC2.59 ETHERCAT1:L4.2
ETHERCAT1:VDD33BIAS [Power]: ETHERCAT1:C5.1 ETHERCAT1:IC2.58 ETHERCAT1:L3.2
ETHERCAT1:VDD33TXRX1 [Power]: ETHERCAT1:C1.1 ETHERCAT1:C2.1 ETHERCAT1:IC2.51 ETHERCAT1:L1.2 ETHERCAT1:R8.2 ETHERCAT1:R9.2 ETHERCAT1:R10.2 ETHERCAT1:R11.2 ETHERCAT1:R16.2
ETHERCAT1:VDD33TXRX2 [Power]: ETHERCAT1:C3.1 ETHERCAT1:C4.1 ETHERCAT1:IC2.64 ETHERCAT1:L2.2 ETHERCAT1:R12.2 ETHERCAT1:R13.2 ETHERCAT1:R14.2 ETHERCAT1:R15.2 ETHERCAT1:R17.2
GND: 5-3.3VCONVERTER1:C33.2 5-3.3VCONVERTER1:C66.2 5-3.3VCONVERTER1:IC3.5 5-3.3VCONVERTER1:IC3.9 5-3.3VCONVERTER2:C33.2 5-3.3VCONVERTER2:C66.2 5-3.3VCONVERTER2:IC3.5 5-3.3VCONVERTER2:IC3.9 5-3.3VCONVERTER3:C33.2 5-3.3VCONVERTER3:C66.2 5-3.3VCONVERTER3:IC3.5 5-3.3VCONVERTER3:IC3.9 ETHERCAT1:C1.2 ETHERCAT1:C2.2 ETHERCAT1:C3.2 ETHERCAT1:C4.2 ETHERCAT1:C5.2 ETHERCAT1:C6.2 ETHERCAT1:C7.2 ETHERCAT1:C8.2 ETHERCAT1:C9.2 ETHERCAT1:C10.2 ETHERCAT1:C11.2 ETHERCAT1:C12.2 ETHERCAT1:C13.2 ETHERCAT1:C14.2 ETHERCAT1:C15.2 ETHERCAT1:C16.2 ETHERCAT1:C17.2 ETHERCAT1:C18.2 ETHERCAT1:C19.2 ETHERCAT1:C20.1 ETHERCAT1:C21.1 ETHERCAT1:C22.2 ETHERCAT1:C31.2 ETHERCAT1:C32.2 ETHERCAT1:C33.2 ETHERCAT1:C66.2 ETHERCAT1:D2.1 ETHERCAT1:D3.1 ETHERCAT1:IC1.1 ETHERCAT1:IC1.2 ETHERCAT1:IC1.3 ETHERCAT1:IC1.4 ETHERCAT1:IC1.7 ETHERCAT1:IC1.9 ETHERCAT1:IC2.4 ETHERCAT1:IC2.8 ETHERCAT1:IC2.9 ETHERCAT1:IC2.41 ETHERCAT1:IC2.65 ETHERCAT1:IC3.5 ETHERCAT1:IC3.9 ETHERCAT1:R2.1 ETHERCAT1:R3.2 ETHERCAT1:R24.1 ETHERCAT1:R25.1 ETHERCAT1:Y1.2 ETHERCAT1:Y1.4 HALL1:X1.1 I_SENSOR1:C1.1 I_SENSOR1:C2.2 I_SENSOR1:C3.1 I_SENSOR1:IC1.5 I_SENSOR1:IC1.6 I_SENSOR1:IC1.8 I_SENSOR1:IC1.9 I_SENSOR1:IC1.11 I_SENSOR2:C1.1 I_SENSOR2:C2.2 I_SENSOR2:C3.1 I_SENSOR2:IC1.5 I_SENSOR2:IC1.6 I_SENSOR2:IC1.8 I_SENSOR2:IC1.9 I_SENSOR2:IC1.11 MICROCONTROLLER1:C1.1 MICROCONTROLLER1:C2.1 MICROCONTROLLER1:C3.1 MICROCONTROLLER1:C5.2 MICROCONTROLLER1:C6.2 MICROCONTROLLER1:C7.2 MICROCONTROLLER1:C8.1 MICROCONTROLLER1:D1.1 MICROCONTROLLER1:D3.1 MICROCONTROLLER1:H1.3 MICROCONTROLLER1:H1.5 MICROCONTROLLER1:H3.5 MICROCONTROLLER1:H3.7 MICROCONTROLLER1:IC1.5 MICROCONTROLLER1:IC1.18 MICROCONTROLLER1:IC1.35 MICROCONTROLLER1:IC1.42 MICROCONTROLLER1:S1.2 MICROCONTROLLER1:S1.4 MOTORDRV1:IC1.18 POWERSUPPLY1:C1.2 POWERSUPPLY1:IC1.5 TORQUE1:C1.2 TORQUE1:C3.2 TORQUE1:C4.2 TORQUE1:CR2.1 TORQUE1:CR3.1 TORQUE1:IC1.4 TORQUE1:R2.1 TORQUE1:X3.1 X2.2
HALL_A: HALL1:R3.2 HALL1:X1.5 MICROCONTROLLER1:H3.13 MICROCONTROLLER1:IC1.11
HALL_B: HALL1:R2.2 HALL1:X1.4 MICROCONTROLLER1:H3.11 MICROCONTROLLER1:IC1.10
HALL_C: HALL1:R1.2 HALL1:X1.3 MICROCONTROLLER1:H3.9 MICROCONTROLLER1:IC1.9
I2-: I_SENSOR1:C2.1 I_SENSOR1:R1.1 MICROCONTROLLER1:H2.6 MICROCONTROLLER1:IC1.7
I3+: I_SENSOR2:C2.1 I_SENSOR2:R1.1 MICROCONTROLLER1:H2.8 MICROCONTROLLER1:IC1.8
I_SENSOR1:VI: I_SENSOR1:C1.2 I_SENSOR1:IC1.10 I_SENSOR1:R1.2
I_SENSOR2:VI: I_SENSOR2:C1.2 I_SENSOR2:IC1.10 I_SENSOR2:R1.2
IRQ: ETHERCAT1:IC2.44
MICROCONTROLLER1:ECAT_GPIO4: MICROCONTROLLER1:IC1.24
MICROCONTROLLER1:HALL_OUT: MICROCONTROLLER1:IC1.12
MICROCONTROLLER1:LED_PA27: MICROCONTROLLER1:IC1.39 MICROCONTROLLER1:R6.1
MICROCONTROLLER1:LED_PB23: MICROCONTROLLER1:IC1.38 MICROCONTROLLER1:R5.1
MICROCONTROLLER1:N$1: MICROCONTROLLER1:R3.1 MICROCONTROLLER1:S1.1 MICROCONTROLLER1:S1.3
MICROCONTROLLER1:N$2: MICROCONTROLLER1:D3.2 MICROCONTROLLER1:R6.2
MICROCONTROLLER1:N$4: MICROCONTROLLER1:D1.2 MICROCONTROLLER1:R5.2
MICROCONTROLLER1:NRESET: MICROCONTROLLER1:C2.2 MICROCONTROLLER1:H1.10 MICROCONTROLLER1:IC1.40 MICROCONTROLLER1:R3.2 MICROCONTROLLER1:R24.2
MICROCONTROLLER1:SWCLK: MICROCONTROLLER1:H1.4 MICROCONTROLLER1:IC1.45 MICROCONTROLLER1:R1.1
MICROCONTROLLER1:SWDIO: MICROCONTROLLER1:H1.2 MICROCONTROLLER1:IC1.46
MICROCONTROLLER1:VDDANA: MICROCONTROLLER1:C1.2 MICROCONTROLLER1:C6.1 MICROCONTROLLER1:IC1.6 MICROCONTROLLER1:L2.2
MICROCONTROLLER1:VDDCORE: MICROCONTROLLER1:C7.1 MICROCONTROLLER1:C8.2 MICROCONTROLLER1:IC1.41 MICROCONTROLLER1:L1.2
MICROCONTROLLER1:VSW: MICROCONTROLLER1:IC1.43 MICROCONTROLLER1:L1.1
MOTORDRV1:CP1: MOTORDRV1:C2.1 MOTORDRV1:IC1.20
MOTORDRV1:CP2: MOTORDRV1:C2.2 MOTORDRV1:IC1.21
MOTORDRV1:N$1: MOTORDRV1:D1.1 MOTORDRV1:R1.2
MOTORDRV1:VCP: MOTORDRV1:C1.1 MOTORDRV1:IC1.19
MOTORDRV1:VG: MOTORDRV1:C3.1 MOTORDRV1:IC1.14
NFAULT: MICROCONTROLLER1:IC1.32 MOTORDRV1:IC1.1 MOTORDRV1:R1.1
NSLEEP: MICROCONTROLLER1:IC1.31 MOTORDRV1:IC1.2
OUT1 [Power]: MOTORDRV1:IC1.9 MOTORDRV1:IC1.26 X1.1
OUT2 [Power]: I_SENSOR1:IC1.1,2 X1.2
OUT3 [Power]: I_SENSOR2:IC1.3,4 X1.3
PWMA: MICROCONTROLLER1:H2.3 MICROCONTROLLER1:IC1.27 MOTORDRV1:IC1.6
PWMB: MICROCONTROLLER1:H2.2 MICROCONTROLLER1:IC1.26 MOTORDRV1:IC1.7
PWMC: MICROCONTROLLER1:H2.1 MICROCONTROLLER1:IC1.25 MOTORDRV1:IC1.8
SB: I_SENSOR1:IC1.3,4 MOTORDRV1:IC1.11 MOTORDRV1:IC1.24
SC: I_SENSOR2:IC1.1,2 MOTORDRV1:IC1.13 MOTORDRV1:IC1.22
SYNC0: ETHERCAT1:IC2.34 MICROCONTROLLER1:H3.14 MICROCONTROLLER1:IC1.23
SYNC1: ETHERCAT1:IC2.18 MICROCONTROLLER1:H3.12 MICROCONTROLLER1:IC1.22
TORQUE1:+VO_B: TORQUE1:C3.1 TORQUE1:CR1.1 TORQUE1:CR2.2 TORQUE1:IC1.3 TORQUE1:X3.3
TORQUE1:-VO_B: TORQUE1:C4.1 TORQUE1:CR3.2 TORQUE1:CR4.1 TORQUE1:IC1.2 TORQUE1:X3.2
TORQUE1:V_FB: TORQUE1:C2.2 TORQUE1:IC1.6 TORQUE1:R3.2 TORQUE1:R4.1
TORQUE1:VI_REF: TORQUE1:IC1.1 TORQUE1:R1.1 TORQUE1:R2.2
VREF_TS: MICROCONTROLLER1:H2.11 MICROCONTROLLER1:IC1.4 TORQUE1:IC1.5 TORQUE1:R3.1
WAIT_ACK: ETHERCAT1:IC2.10 ETHERCAT1:R3.1 MICROCONTROLLER1:H3.10 MICROCONTROLLER1:IC1.21